# Altium PCB COF.PcbDoc (part 2 of 5)
Units mm, origin at the board's own origin, x right, y up, seen from the top; angles counter-clockwise.
Board outline 42.1 x 32.68 mm, 2 copper layers (TOP, BOTTOM), stack 0.321 mm thick; 42 components, 54 nets, 189 pads, 156 vias.
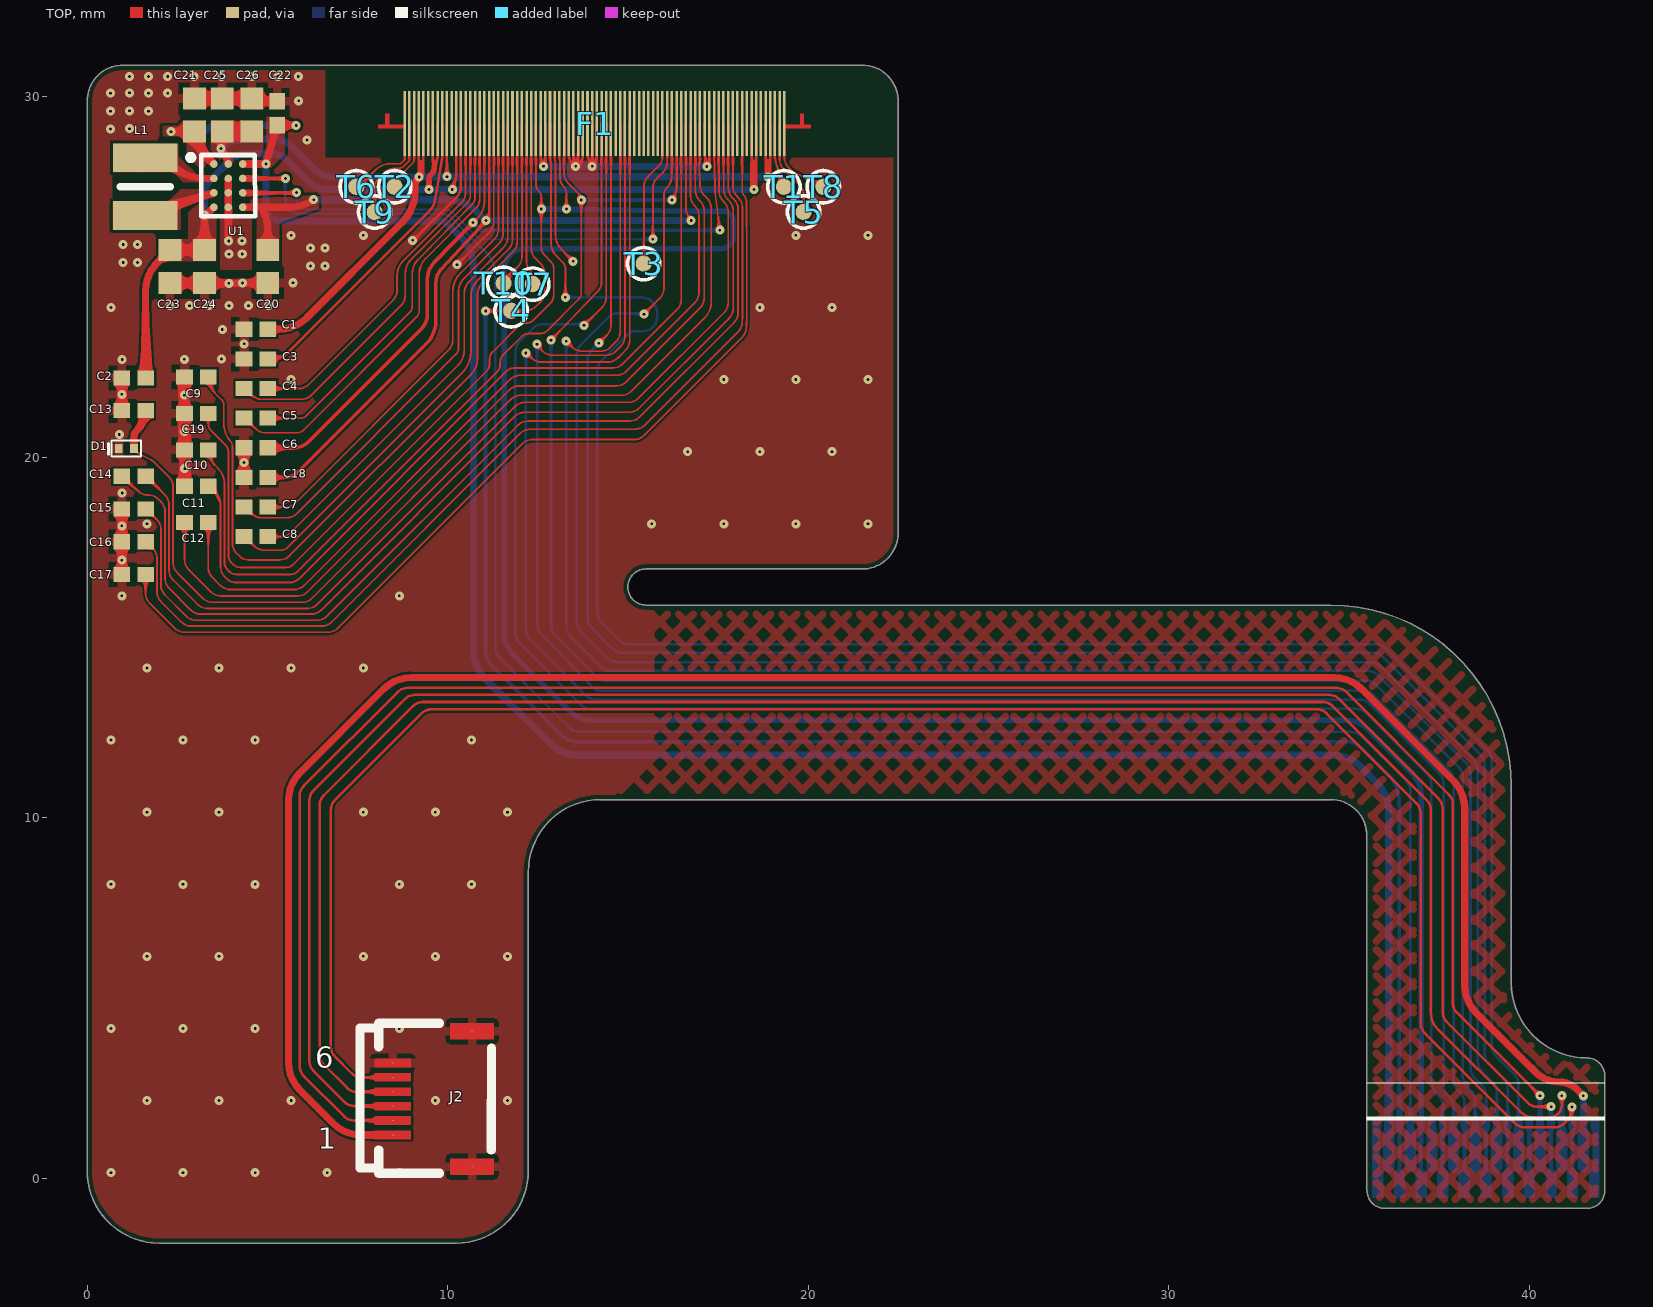
[diagram p0: TOP view]

## Via types
v1: diameter 0.25, hole 0.075, TOP to BOTTOM, tented both sides, 156 vias

## Nets (pads, with @x,y where several pads share a name; then routed paths per layer and width w, separated by ;. In a path a pad name is that pad's centre, name@x,y a point inside that pad or via, vN(x,y) a via of type N, cw(c..) or ccw(c..) an arc to the next point about the centre after c; other vN are vias at no path point) (continued)
VLOUT3: (continued)
  TOP w0.05: D1.2@1.298,20.24 1.383,20.135 1.462,20.089 ccw(c1.6,20.327) 1.472,20.084 1.773,19.924 cw(c1.593,19.584) 1.866,19.856 2.275,19.447 cw(c2.002,19.175) 2.387,19.175 2.387,17.069 ccw(c2.772,17.069) 2.499,16.798 3.213,16.084 ccw(c3.484,16.357) 3.484,15.972 5.968,15.972 ccw(c5.968,16.357) 6.24,16.084 11.758,21.602 cw(c12.029,21.329) 12.029,21.714 14.82,21.714 ccw(c14.82,22.099) 15.092,21.827 17.137,23.872 ccw(c16.714,24.296) 17.313,24.296 17.313,26.909 ccw(c16.928,26.909) 17.2,27.182 17.115,27.267 cw(c17.386,27.54) 17.002,27.525 16.981,28.056 cw(c17.191,28.064) 16.982,28.082 17.001,28.301
  TOP w0.07: 17.001,28.301 F1.64@17.001,29.251
  TOP w0.2: D1.2@1.298,20.24 1.298,20.555 cw(c1.547,20.555) 1.371,20.731 ; 1.371,20.731 1.406,20.766 ccw(c0.883,21.289) C13.1@1.623,21.289